# Altium PCB Robot  Omini Design.PcbDoc
Units mm, origin at the board's own origin, x right, y up, seen from the top; angles counter-clockwise.
Board outline 129.92 x 101.35 mm, 2 copper layers (Top Layer, Bottom Layer); 20 components, 38 nets, 167 pads, 10 vias.
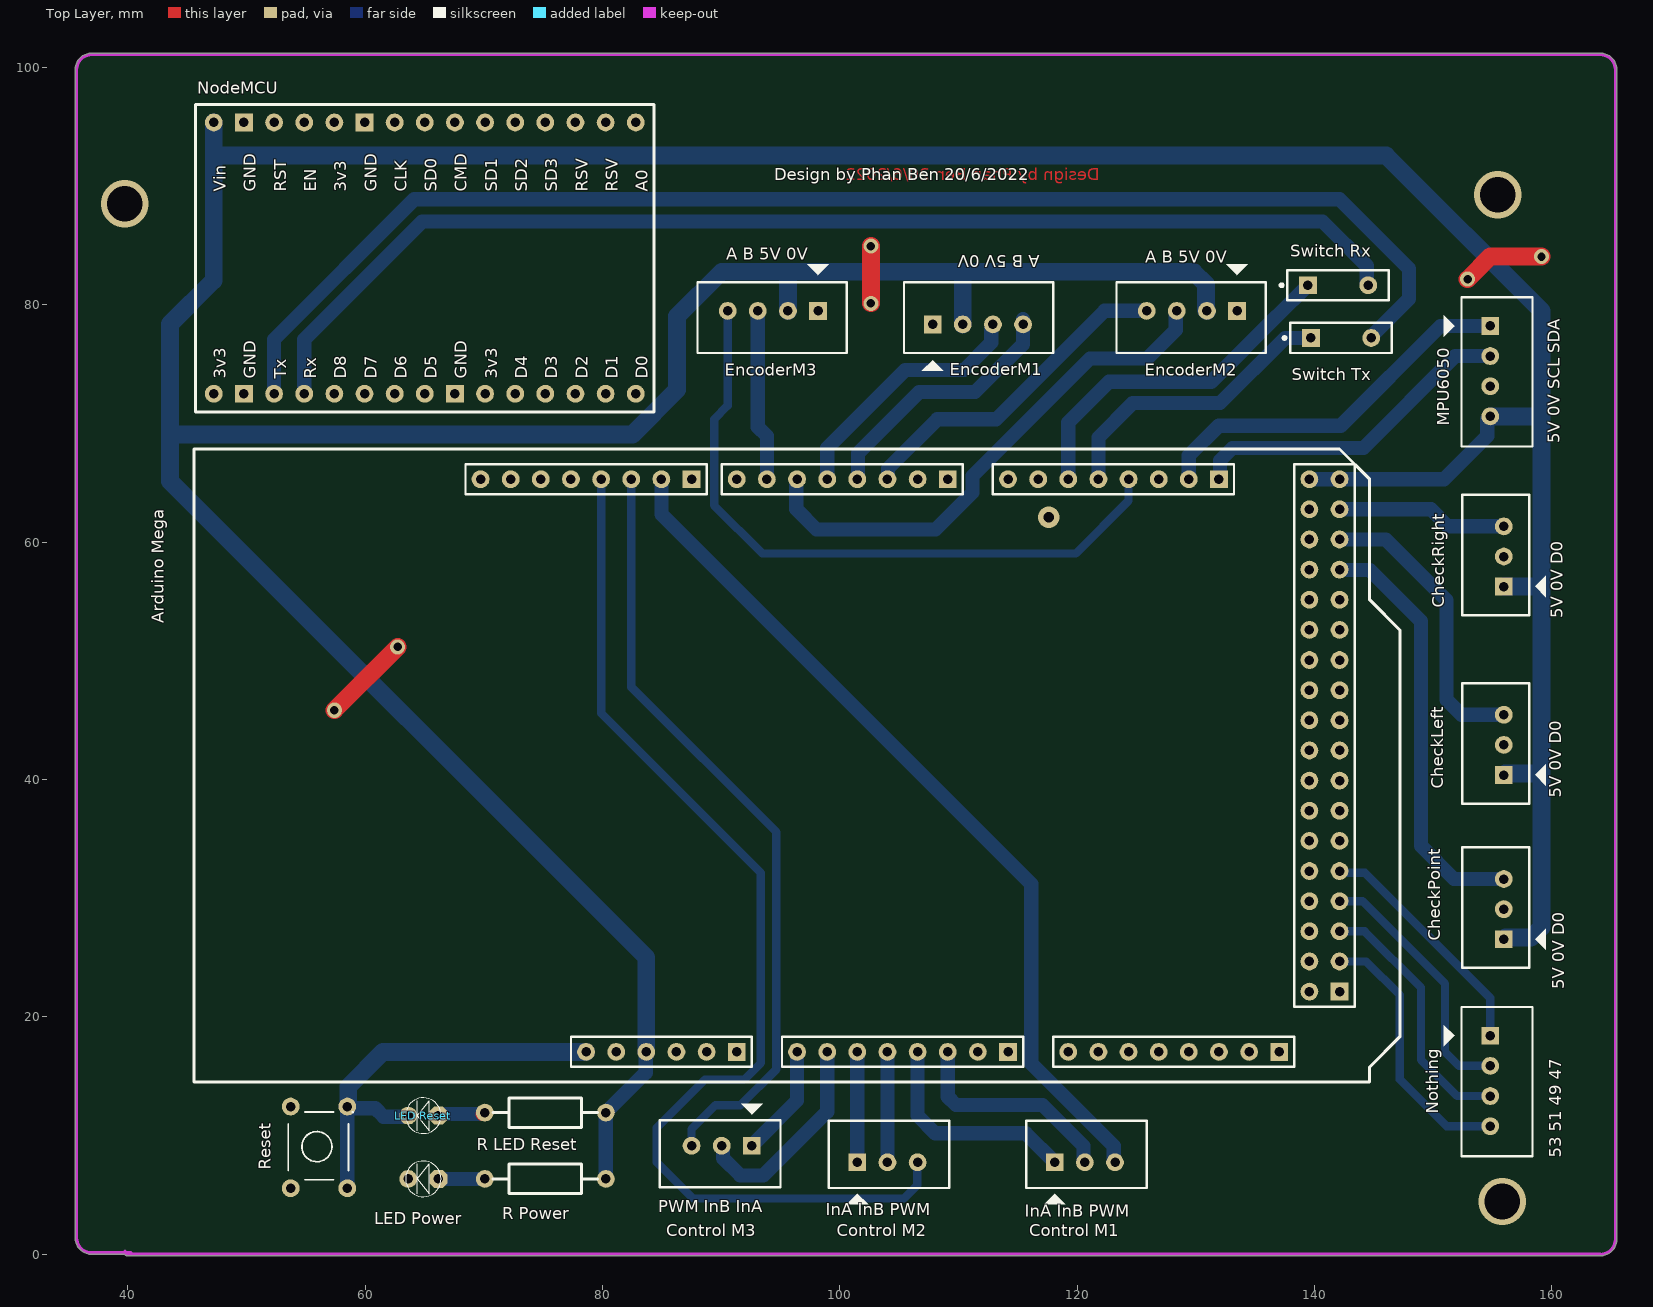
[diagram p0: Top Layer view]
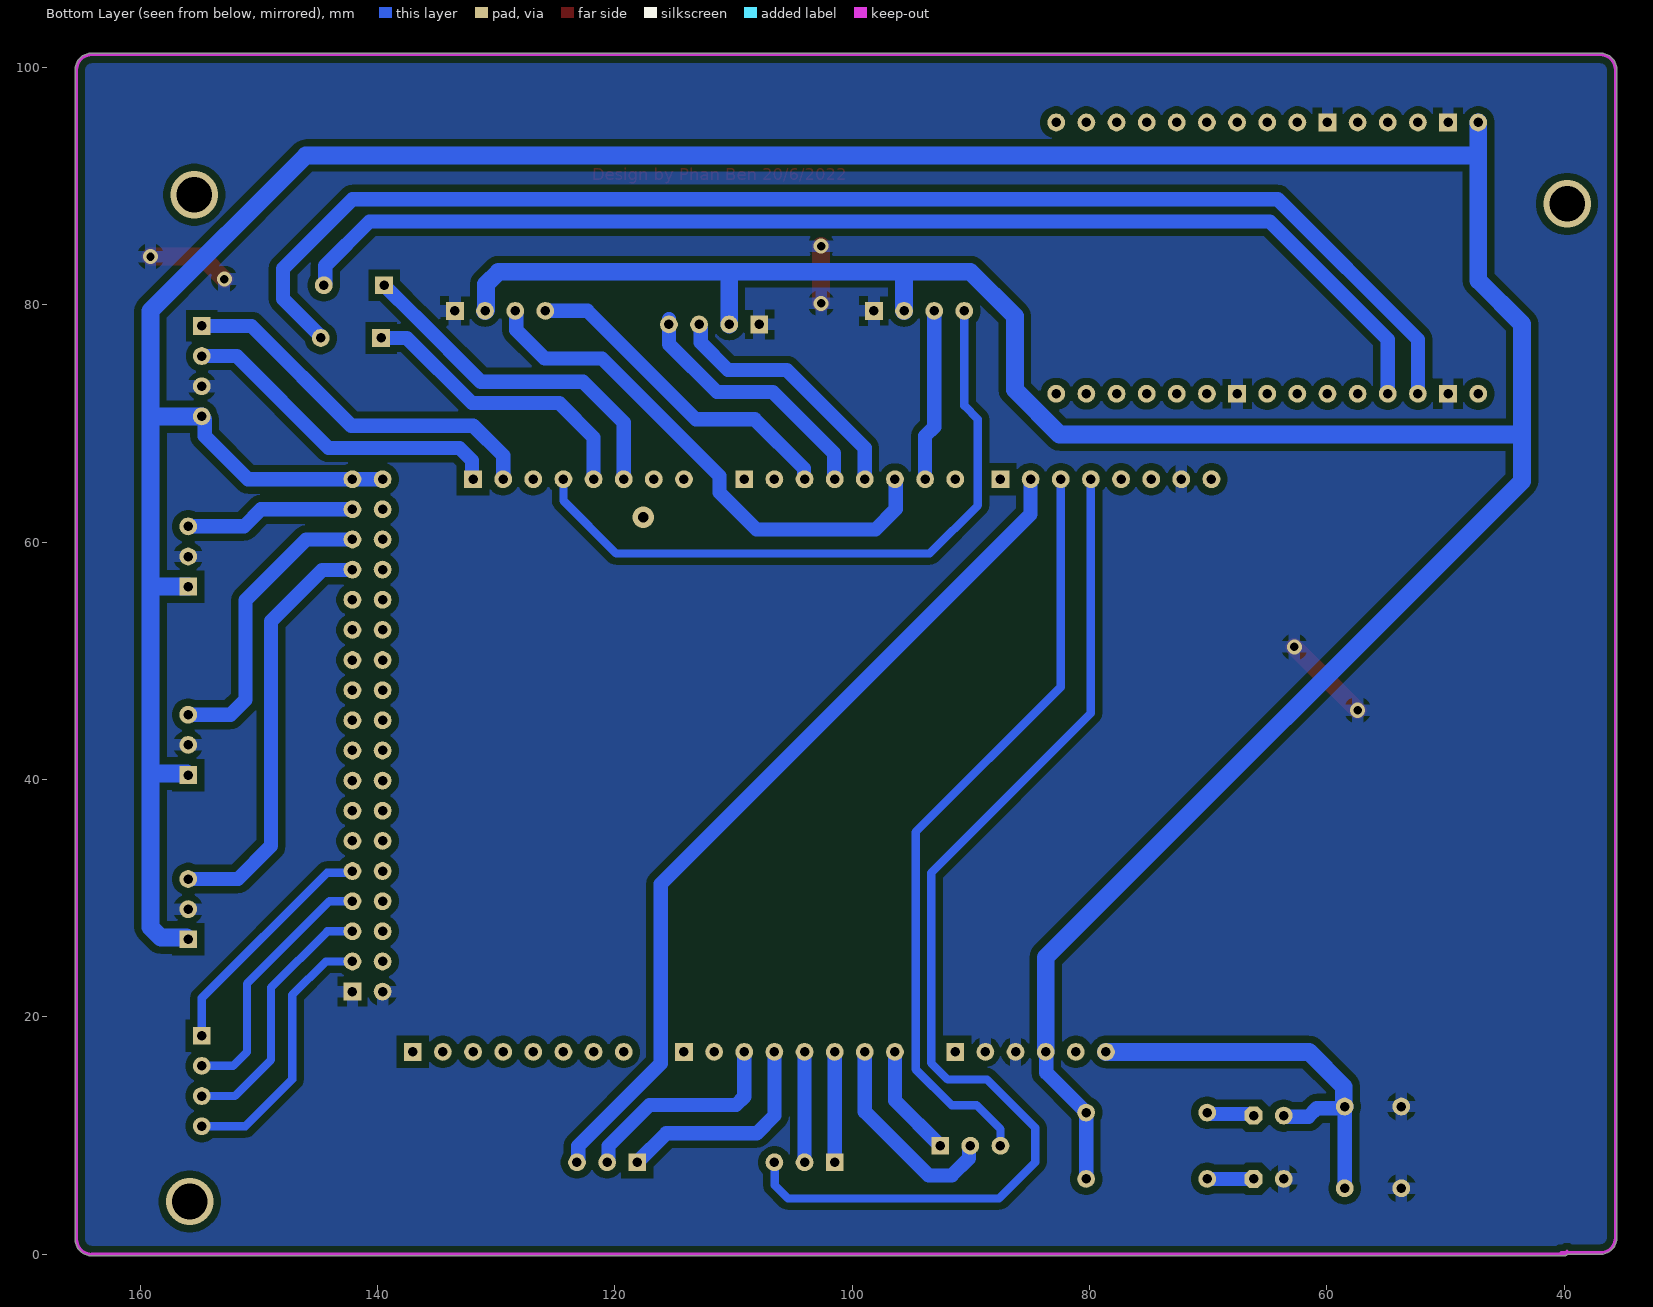
[diagram p1: Bottom Layer view, seen from below]
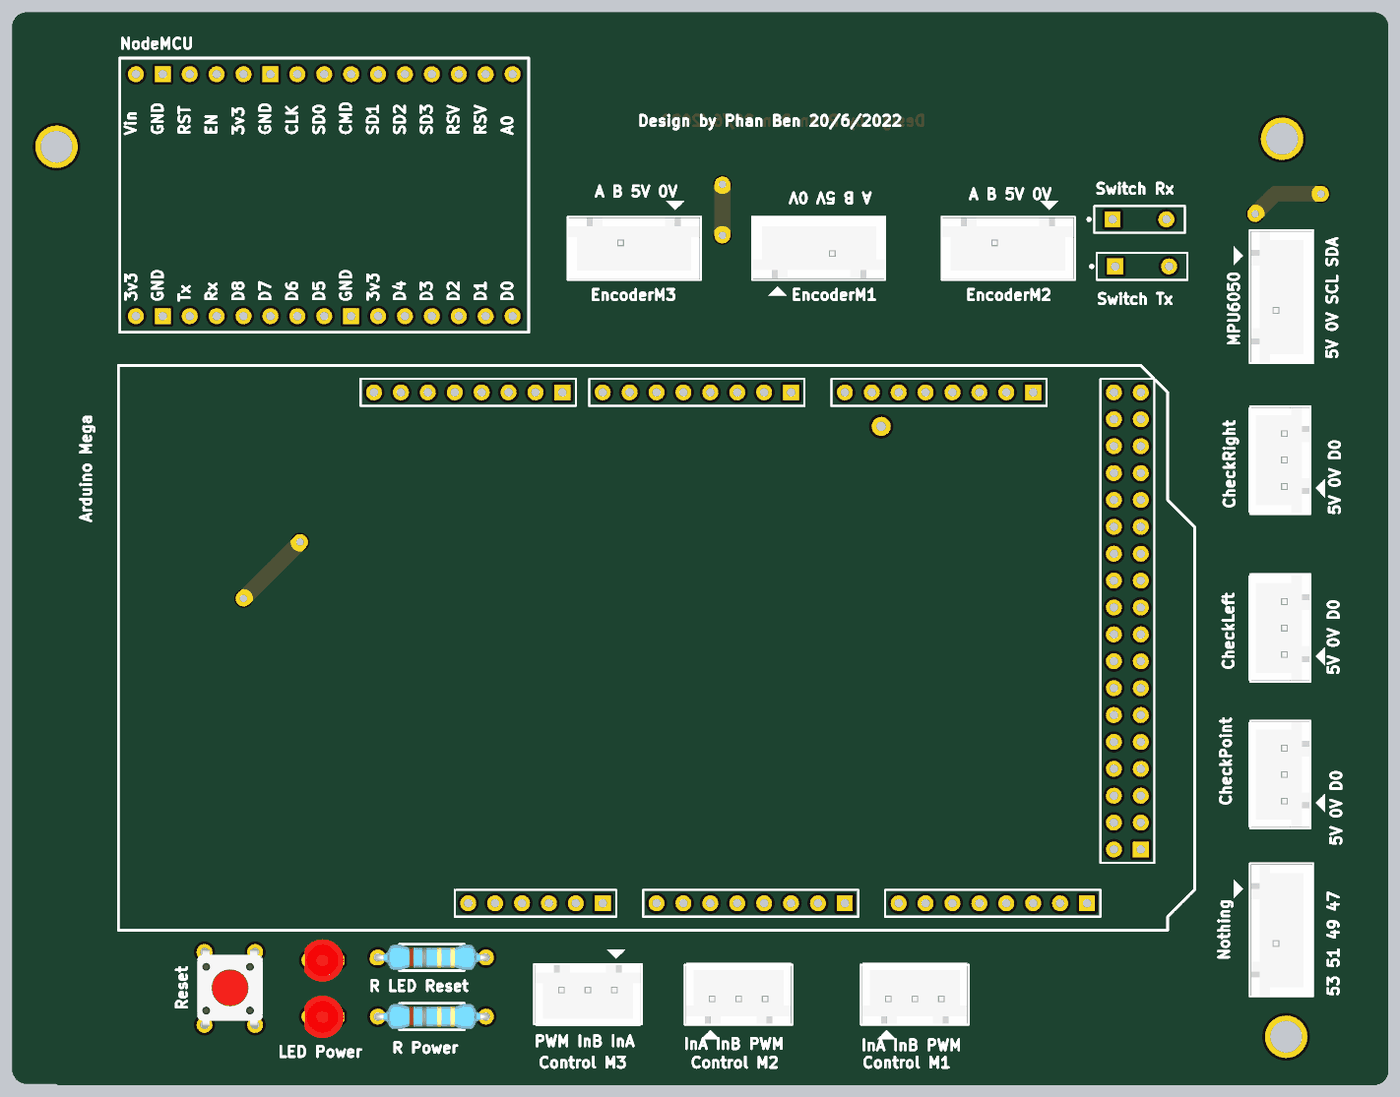
[diagram p2: 3D render of the assembled board from above, using the file's embedded part models]

## Layer stack, top to bottom
Top Solder: solder mask 0.0102, Solder Resist, Dk 3.5
Top Layer: signal copper 0.0356
Dielectric 1: dielectric 0.32, FR-4, Dk 4.8
Bottom Layer: signal copper 0.0356
Bottom Solder: solder mask 0.0102, Solder Resist, Dk 3.5

## Board outline
35.56,1.397 ccw(c36.957,1.397) 36.957,0 39.721,0 ccw(c40.005,0.254) 40.005,-0.127 164.084,-0.127 ccw(c164.084,1.27) 165.481,1.27 165.481,99.822 ccw(c164.084,99.822) 164.084,101.219 36.957,101.219 ccw(c36.957,99.822) 35.56,99.822

## Design rules (kind name [scope] priority, off if disabled: settings)
Clearance [All] p1: gap=0.6 ignorepadtopadclearanceinfootprint=FALSE
PlaneConnect [All] p1: planeconnectstyle=Relief reliefexpansion=1 reliefentries=4 reliefconductorwidth=1 reliefairgap=1
PolygonConnect [All] p1: connectstyle=Relief reliefconductorwidth=1 reliefentries=4 polygonreliefangle="90 Angle" airgapwidth=0.5
RoutingVias [All] p1: holewidth=0.711 width=1.27 viastyle="Through Hole" minholewidth=0.711 minwidth=1.27 maxholewidth=0.711 maxwidth=1.27
SolderMaskExpansion [All] p1: expansion=0.254 istentingtop=FALSE
Width [All] p1: maxlimit=1.5 minlimit=0.7 preferedwidth=1.2 minimp=50.000000 maximp=50.000000 favimp=50.000000 checkconnectedcopper=TRUE
29 further rules are at their usual default settings.

## Components (designator, comment, footprint, x,y, rotation, side; value= is the part's Value field where it differs from the comment)
"Arduino Mega" "ARDUINO MEGA" "ARDUINO MEGA" 98.933,42.456 r0 top
CheckLeft "" "Header DT 3P_2.54" 155.956,40.386 r180 top
CheckPoint "" "Header DT 3P_2.54" 155.956,26.543 r180 top
CheckRight "" "Header DT 3P_2.54" 155.956,56.261 r180 top
"Control M1" "" "Header DT 3P_2.54" 118.11,7.747 r90 top
"Control M2" "" "Header DT 3P_2.54" 101.473,7.747 r90 top
"Control M3" "" "Header DT 3P_2.54" 92.583,9.144 r270 top
EncoderM1 "Header 4P 2.54 Duc Thang" "Header DT 4P_2.54" 107.823,78.359 r90 top
EncoderM2 "Header 4P 2.54 Duc Thang" "Header DT 4P_2.54" 133.477,79.502 r270 top
EncoderM3 "Header 4P 2.54 Duc Thang" "Header DT 4P_2.54" 98.171,79.502 r270 top
"LED Power" "LED 3mm" LED-3MM-RED 66.167,6.35 r180 top
"LED Reset" "LED 3mm" LED-3MM-RED 66.167,11.684 r180 top
MPU6050 "Header 4P 2.54 Duc Thang" "Header DT 4P_2.54" 154.813,78.232 r0 top
NodeMCU "Node MCU ESP8266" "NodeMCU DevKit v1.0 - Inside Labels" 47.244,72.517 r90 top
Nothing "Header 4P 2.54 Duc Thang" "Header DT 4P_2.54" 154.813,18.415 r0 top
"R LED Reset" "330" "tro vach 1/4w" 75.184,11.938 r180 top
"R Power" "330" "tro vach 1/4w" 75.184,6.35 r180 top
Reset "Nut Nhan 4 Chan Cam 6x6" "Nut Nhan 4 Chan Cam 6x6" 53.518,5.893 r90 top
"Switch Rx" "SW-SPST" SPST-2 141.986,81.661 r0 top
"Switch Tx" "SW-SPST" SPST-2 142.24,77.216 r0 top

## Footprints (in the part's own frame and the unit in brackets; to place one, negate y for a bottom-side part, rotate by r counter-clockwise, add the part's x,y. Pads: shape width x height; smd on the part's side, far side on the other; paste and mask are expansions set on the pad)
"ARDUINO MEGA" [mm] "Arduino Mega 2560"
  rect 1.5x1.5 hole 0.8: 0(10.16,22.86) 8(-11.43,22.86) 21(33.02,22.86) 59(-7.62,-25.4) 67(15.24,-25.4) 75(38.1,-25.4) 79(43.18,-20.32)
  round 1.5 hole 0.8: 1(7.62,22.86) 2(5.08,22.86) 3(2.54,22.86) 4(0,22.86) 5(-2.54,22.86) 6(-5.08,22.86) 7(-7.62,22.86) 9(-13.97,22.86) 10(-16.51,22.86) 11(-19.05,22.86) 12(-21.59,22.86) 13(-24.13,22.86) 14(15.24,22.86) 15(17.78,22.86) 16(20.32,22.86) 17(22.86,22.86) 18(25.4,22.86) 19(27.94,22.86) 20(30.48,22.86) 22(40.64,20.32) 23(43.18,20.32) 24(40.64,17.78) 25(43.18,17.78) 26(40.64,15.24) 27(43.18,15.24) 28(40.64,12.7) 29(43.18,12.7) 30(40.64,10.16) 31(43.18,10.16) 32(40.64,7.62) 33(43.18,7.62) 34(40.64,5.08) 35(43.18,5.08) 36(40.64,2.54) 37(43.18,2.54) 38(40.64,0) 39(43.18,0) 40(40.64,-2.54) 41(43.18,-2.54) 42(40.64,-5.08) 43(43.18,-5.08) 44(40.64,-7.62) 45(43.18,-7.62) 46(40.64,-10.16) 47(43.18,-10.16) 48(40.64,-12.7) 49(43.18,-12.7) 50(40.64,-15.24) 51(43.18,-15.24) 52(40.64,-17.78) 53(43.18,-17.78) 54(-20.32,-25.4) 55(-17.78,-25.4) 56(-15.24,-25.4) 57(-12.7,-25.4) 58(-10.16,-25.4) 60(-2.54,-25.4) 61(0,-25.4) 62(2.54,-25.4) 63(5.08,-25.4) 64(7.62,-25.4) 65(10.16,-25.4) 66(12.7,-25.4) 68(20.32,-25.4) 69(22.86,-25.4) 70(25.4,-25.4) 71(27.94,-25.4) 72(30.48,-25.4) 73(33.02,-25.4) 74(35.56,-25.4) 76(-26.67,22.86) 77(-29.21,22.86) 78(40.64,-20.32) 80(43.18,22.86) 81(40.64,22.86)
  silkscreen extent -53.34,-27.94 48.26,25.4
"Header DT 3P_2.54" [mm]
  rect 1.5x1.5 hole 0.8 unplated: 1(0,0)
  round 1.5 hole 0.8 unplated: 2(0,-2.54) 3(0,-5.08)
  silkscreen extent -3.54,-7.75 3.51,2.41, body extent -2.07,-7.62 3.68,2.28, height 7
"Header DT 4P_2.54" [mm]
  rect 1.5x1.5 hole 0.8: 1(0,0)
  round 1.5 hole 0.8: 2(0,-2.54) 3(0,-5.08) 4(0,-7.62)
  silkscreen extent -3.92,-10.16 3.56,2.41, body extent -2.29,-10.11 3.46,2.29, height 7
LED-3MM-RED [mm]
  oct 1.5x1.5 hole 0.8: 1(0,0)
  round 1.5 hole 0.8: 2(2.54,0)
  silkscreen extent -0.23,-1.5 2.77,1.5, body extent -0.69,-1.97 2.98,2.03, height 4.6
"NodeMCU DevKit v1.0 - Inside Labels" [mm]
  round 1.5 hole 0.8: 1(0,0) 3(0,-5.08) 4(0,-7.62) 5(0,-10.16) 6(0,-12.7) 7(0,-15.24) 8(0,-17.78) 10(0,-22.86) 11(0,-25.4) 12(0,-27.94) 13(0,-30.48) 14(0,-33.02) 15(0,-35.56) 16(22.86,-35.56) 17(22.86,-33.02) 18(22.86,-30.48) 19(22.86,-27.94) 20(22.86,-25.4) 21(22.86,-22.86) 22(22.86,-20.32) 23(22.86,-17.78) 24(22.86,-15.24) 26(22.86,-10.16) 27(22.86,-7.62) 28(22.86,-5.08) 30(22.86,0)
  rect 1.5x1.5 hole 0.8: 2(0,-2.54) 9(0,-20.32) 25(22.86,-12.7) 29(22.86,-2.54)
  silkscreen extent -1.52,-37.08 24.38,1.52
"Nut Nhan 4 Chan Cam 6x6" [mm] "SW button 4pin, 250 x250 mil"
  round 1.5 hole 0.8: 1(-0.33,-0.203) 1(6.553,-0.203) 2(-0.33,-4.978) 2(6.553,-4.978)
  silkscreen extent 0.38,-5.46 6.1,0, body extent -0.77,-5.71 7.12,0.48, height 7
SPST-2 [mm] "Switch; 2 Leads"
  rect 1.5x1.5 hole 0.8: 1(-2.54,0)
  round 1.5 hole 0.8: 2(2.54,0)
  silkscreen extent -4.89,-1.27 4.28,1.27
"tro vach 1/4w" [mm]
  round 1.5 hole 0.8: 1(-5.1,0) 2(5.1,0)
  silkscreen extent -4.39,-1.25 4.42,1.25, body extent -5.38,-1.2 5.38,1.2, height 2.41

## Part data
CheckLeft CheckPoint CheckRight "Control M1" "Control M2" "Control M3": library part "Header 3P 2.54 Duc Thang", "Cắm", Chung_Loai=Cắm, Don_Vi=Con, Ma_Hang=MH001292, Ten_Linh_Kien="Header 3P XH2.54-3P Đực Thẳng"
EncoderM1 EncoderM2 EncoderM3 MPU6050 Nothing: "Cắm", Chung_Loai=Cắm, Don_Vi=Con, Ma_Hang=MH001285, Ten_Linh_Kien="Header 4P XH2.54-4P Đực Thẳng"
"LED Power" "LED Reset": library part "LED 3mm Do", "Cắm", Chung_Loai=Cắm, Don_Vi=Con, Ma_Hang=MH003892, Ten_Linh_Kien="Led 3MM Phủ Đỏ (10c)"
NodeMCU: library part "NodeMCU DevKit v1.0"
"R LED Reset" "R Power": library part "Tro Vach 1/4W 5% 510R", "Cắm", Chung_Loai=Cắm, Don_Vi=Con, Ma_Hang=MH007325, So_Chan=2, Ten_Linh_Kien="Trở Vạch 1/4w 5% 510R"
Reset: "Nut Nhan 4 Chan 6x6mm", Ma_Hang=MH004584, Ten="Nút Nhấn 4 Chân 6x6x5MM DIP"
"Switch Rx" "Switch Tx": "Single-Pole, Single-Throw Switch", LatestRevisionDate=17-Jul-2002, LatestRevisionNote="Re-released for DXP Platform.", PackageDescription="Switch; 2 Leads", PackageReference=SPST-2, Published=24-Mar-1999, Publisher="Altium Limited"

## Free pads (board coordinates)
  round 1.5 hole 0.8: 6(155.956,56.261)

## Via types
v1: diameter 1.27, hole 0.711, Top Layer to Bottom Layer, 6 vias
v2: diameter 4, hole 3, Top Layer to Bottom Layer, 3 vias
v3: diameter 1.8, hole 0.9, Top Layer to Bottom Layer, 1 vias

## Nets (pads, with @x,y where several pads share a name; then routed paths per layer and width w, separated by ;. In a path a pad name is that pad's centre, name@x,y a point inside that pad or via, vN(x,y) a via of type N, cw(c..) or ccw(c..) an arc to the next point about the centre after c; other vN are vias at no path point)
2: "Arduino Mega.2" EncoderM2.4 | length 28.2
  Bottom Layer w1.2: 104.013,65.316 104.07,65.374 104.07,66.224 108.204,70.358 113.157,70.358 122.301,79.502 EncoderM2.4
3: "Arduino Mega.3" EncoderM1.4 | length 22
  Bottom Layer w1.2: 101.473,65.316 101.53,65.374 101.53,67.494 106.702,72.666 111.401,72.666 115.427,76.692 EncoderM1.4@115.427,78.814
4: "Arduino Mega.4" EncoderM1.3 | length 21.3
  Bottom Layer w1.2: 98.933,65.316 98.933,67.945 105.507,74.519 110.46,74.519 112.768,76.827 EncoderM1.3@112.768,78.029
5: "Arduino Mega.5" EncoderM2.3 | length 44.6
  Bottom Layer w1.2: 96.393,65.316 96.336,65.259 96.336,62.795 98.044,61.087 108.061,61.087 111.177,64.203 111.177,65.584 113.157,67.564 121.075,75.482 125.901,75.482 128.317,77.898 128.317,79.422 EncoderM2.3
5v: "Arduino Mega.56" "Arduino Mega.80" "Arduino Mega.81" "R LED Reset.1" "R Power.1" CheckLeft.1 CheckPoint.1 CheckRight.1 EncoderM1.2 EncoderM2.2 EncoderM3.2 MPU6050.4 NodeMCU.30 pad.6 | length 417.5
  Bottom Layer w1.2: 80.284,6.35 80.284,11.938 ; 80.391,12.045 83.636,15.29 83.636,16.999 83.693,17.056 ; 139.573,65.316 142.113,65.316 150.914,65.316 154.559,68.961 154.559,70.358 MPU6050.4
  Bottom Layer w1.5: NodeMCU.30 47.244,92.583 ; 83.693,17.056 83.693,25.019 43.561,65.151 43.561,69.088 ; EncoderM3.2 95.631,82.804 ; EncoderM1.2 110.363,82.677 110.236,82.804 ; EncoderM2.2 130.86,79.579 130.86,81.738 129.794,82.804 110.236,82.804 ; MPU6050.4 159.004,70.612 159.131,70.485 ; CheckPoint.1 156.095,26.682 158.252,26.682 159.131,27.561 159.131,40.513 ; CheckLeft.1 156.083,40.513 159.131,40.513 ; CheckRight.1 159.004,56.261 159.131,56.388 ; 43.561,69.088 82.523,69.088 86.283,72.848 86.283,79.044 90.043,82.804 95.631,82.804 ; 43.561,69.088 43.561,78.388 47.244,82.071 47.244,92.583 ; 47.244,92.583 146.05,92.583 159.131,79.502 159.131,70.485 ; 95.631,82.804 110.236,82.804 ; 159.131,40.513 159.131,56.388 ; 159.131,56.388 159.131,70.485
6: "Arduino Mega.6" EncoderM3.3 | length 14.5
  Bottom Layer w1.2: EncoderM3.3 93.091,69.723 93.853,68.961 93.853,65.316
9: "Arduino Mega.9" "Control M1.3" | length 73.4
  Bottom Layer w1.2: 84.963,65.316 84.963,62.357 116.123,31.197 116.123,16.084 123.079,9.128 123.079,7.858 123.19,7.747
10: "Arduino Mega.10" "Control M3.3" | length 65.4
  Bottom Layer w0.7: 82.423,65.316 82.423,47.79 94.645,35.568 94.645,15.591 91.613,12.559 89.521,12.559 87.503,10.541 87.503,9.144
11: "Arduino Mega.11" "Control M2.3" | length 94.3
  Bottom Layer w0.7: 79.883,65.316 79.883,45.593 93.345,32.131 93.345,16.129 91.948,14.732 88.646,14.732 84.582,10.668 84.582,7.747 87.63,4.699 105.41,4.699 106.519,5.808 106.519,7.713 106.553,7.747
18: "Arduino Mega.18" EncoderM3.4 | length 57.1
  Bottom Layer w0.7: EncoderM3.4 90.551,71.508 89.408,70.365 89.408,63.119 93.472,59.055 119.888,59.055 124.333,63.5 124.333,65.316
22: "Arduino Mega.22"
23: "Arduino Mega.23" CheckRight.3 | length 14.4
  Bottom Layer w1.2: 142.113,62.776 149.822,62.776 151.257,61.341 CheckRight.3
24: "Arduino Mega.24"
25: "Arduino Mega.25" CheckLeft.3 | length 24.9
  Bottom Layer w1.2: 142.113,60.236 146.012,60.236 151.13,55.118 151.13,46.736 152.4,45.466 CheckLeft.3
26: "Arduino Mega.26"
27: "Arduino Mega.27" CheckPoint.3 | length 35.7
  Bottom Layer w1.2: 142.113,57.696 142.151,57.658 144.653,57.658 148.971,53.34 148.971,34.417 151.765,31.623 CheckPoint.3
47: "Arduino Mega.47" Nothing.1 | length 20.3
  Bottom Layer w0.7: 142.113,32.296 142.266,32.143 144.26,32.143 154.813,21.59 Nothing.1
49: "Arduino Mega.49" Nothing.2 | length 21.8
  Bottom Layer w0.7: 142.113,29.756 144.046,29.756 151.003,22.8 151.003,17.047 152.175,15.875 Nothing.2
51: "Arduino Mega.51" Nothing.3 | length 22
  Bottom Layer w0.7: 142.113,27.216 144.234,27.216 148.971,22.479 148.971,16.383 152.019,13.335 Nothing.3
53: "Arduino Mega.53" Nothing.4 | length 22.6
  Bottom Layer w0.7: 142.113,24.676 144.361,24.676 147.193,21.844 147.193,14.732 151.13,10.795 Nothing.4
A0: "Arduino Mega.60" "Control M3.1" | length 9.5
  Bottom Layer w1.2: 92.583,9.144 96.393,12.954 96.393,17.056
A1: "Arduino Mega.61" "Control M3.2" | length 17.7
  Bottom Layer w1.2: 90.043,9.144 90.154,9.033 90.154,8.098 91.618,6.634 93.548,6.634 98.933,12.019 98.933,17.056
A2: "Arduino Mega.62" "Control M2.1" | length 9.3
  Bottom Layer w1.2: 101.473,7.747 101.473,17.056
A3: "Arduino Mega.63" "Control M2.2" | length 9.3
  Bottom Layer w1.2: 104.013,7.747 104.013,17.056
A4: "Arduino Mega.64" "Control M1.1" | length 18.6
  Bottom Layer w1.2: 106.553,17.056 106.553,11.684 108.05,10.187 115.67,10.187 118.11,7.747
A5: "Arduino Mega.65" "Control M1.2" | length 18.4
  Bottom Layer w1.2: 109.093,17.056 109.093,13.276 109.796,12.573 117.088,12.573 120.539,9.122 120.539,7.858 120.65,7.747
GND: "Arduino Mega.57" "Arduino Mega.58" "Arduino Mega.76" "Arduino Mega.78" "Arduino Mega.79" "LED Power.2" CheckLeft.2 CheckPoint.2 CheckRight.2 EncoderM1.1 EncoderM2.1 EncoderM3.1 MPU6050.3 NodeMCU.2 NodeMCU.9 NodeMCU.25 NodeMCU.29 Reset.1 | length 19.4
  Top Layer w1.5: v1(57.404,45.847) v1(62.738,51.181) ; v1(102.616,80.137) v1(102.616,84.963) ; v1(152.908,82.169) 154.813,84.074 v1(159.131,84.074)
"NetLED Power_1": "LED Power.1" "R Power.2" | length 3.9
  Bottom Layer w1.2: 66.167,6.35 70.084,6.35
"NetLED Reset_1": "LED Reset.1" "R LED Reset.2" | length 4
  Top Layer w1.2: 66.167,11.684 66.294,11.811 ; 69.903,11.811 70.03,11.938 70.084,11.938
  Bottom Layer w1.2: 66.294,11.811 69.903,11.811
Reset: "Arduino Mega.54" "LED Reset.2" Reset.2 | length 35.4
  Bottom Layer w1.2: Reset.2@58.496,5.563 58.496,12.446 58.631,12.311 60.841,12.311 61.554,11.598 63.541,11.598 63.627,11.684
  Bottom Layer w1.5: Reset.2@58.496,12.446 58.574,12.523 58.574,14.124 61.506,17.056 78.613,17.056
rx0: "Switch Rx.2" NodeMCU.4 | length 101.5
  Bottom Layer w1.2: NodeMCU.4 54.864,77.089 64.815,87.04 140.671,87.04 144.402,83.309 144.402,81.785 144.526,81.661
rx01: "Arduino Mega.16" "Switch Rx.1" | length 29.8
  Bottom Layer w1.2: 119.253,65.316 119.253,70.104 122.682,73.533 131.301,73.533 136.784,79.016 136.801,79.016 139.446,81.661
rx1: NodeMCU.13
SCL: "Arduino Mega.21" MPU6050.2 | length 28
  Bottom Layer w1.2: 131.953,65.316 132.033,65.396 132.033,66.882 133.096,67.945 144.123,67.945 151.87,75.692 MPU6050.2
SDA: "Arduino Mega.20" MPU6050.1 | length 31.9
  Bottom Layer w1.2: 129.413,65.316 129.413,67.31 131.931,69.828 142.218,69.828 150.622,78.232 MPU6050.1
tx0: "Switch Tx.2" NodeMCU.3 | length 114.7
  Bottom Layer w1.2: NodeMCU.3 52.324,77.095 64.129,88.9 142.113,88.9 147.955,83.058 147.955,80.518 144.78,77.343 144.78,77.216
tx01: "Arduino Mega.17" "Switch Tx.1" | length 24.9
  Bottom Layer w1.2: 121.793,65.316 121.793,68.834 124.692,71.733 132.046,71.733 137.529,77.216 139.7,77.216
tx1: NodeMCU.14
pads on no net: "Arduino Mega.0" "Arduino Mega.1" "Arduino Mega.7" "Arduino Mega.8" "Arduino Mega.12" "Arduino Mega.13" "Arduino Mega.14" "Arduino Mega.15" "Arduino Mega.19" "Arduino Mega.28" "Arduino Mega.29" "Arduino Mega.30" "Arduino Mega.31" "Arduino Mega.32" "Arduino Mega.33" "Arduino Mega.34" "Arduino Mega.35" "Arduino Mega.36" "Arduino Mega.37" "Arduino Mega.38" "Arduino Mega.39" "Arduino Mega.40" "Arduino Mega.41" "Arduino Mega.42" "Arduino Mega.43" "Arduino Mega.44" "Arduino Mega.45" "Arduino Mega.46" "Arduino Mega.48" "Arduino Mega.50" "Arduino Mega.52" "Arduino Mega.55" "Arduino Mega.59" "Arduino Mega.66" "Arduino Mega.67" "Arduino Mega.68" "Arduino Mega.69" "Arduino Mega.70" "Arduino Mega.71" "Arduino Mega.72" "Arduino Mega.73" "Arduino Mega.74" "Arduino Mega.75" "Arduino Mega.77" NodeMCU.1 NodeMCU.5 NodeMCU.6 NodeMCU.7 NodeMCU.8 NodeMCU.10 NodeMCU.11 NodeMCU.12 NodeMCU.15 NodeMCU.16 NodeMCU.17 NodeMCU.18 NodeMCU.19 NodeMCU.20 NodeMCU.21 NodeMCU.22 NodeMCU.23 NodeMCU.24 NodeMCU.26 NodeMCU.27 NodeMCU.28
copper on no net:
  other v2: 155.829,4.445 39.751,88.519 155.448,89.281
  other v3: 117.602,62.103

## Polygon pours and split planes (outlines as drawn)
GND on Bottom Layer "NONET_L-01_P-001" (solid, remove dead copper, pour order 0): 35.877,100.965 165.799,100.965 165.799,0 35.877,0 35.752,1.018

## Keep-outs
Keep-Out Layer:
  lines w0.254: 39.751,0.254 ccw(c40.005,0.254) 40.005,0 157.861,0 164.084,0 ccw(c164.084,1.27) 165.354,1.27 165.354,5.969 165.354,99.822 ccw(c164.084,99.822) 164.084,101.092 76.581,101.092 36.957,101.092 ccw(c36.957,99.822) 35.687,99.822 35.687,97.409 35.687,1.397 ccw(c36.957,1.397) 36.957,0.127 40.259,0.127

## Other copper
Top Layer:
  text "Design by Phan Ben 20/6/2022" at 121.92,90.503 h1

## Silkscreen, mask and mechanical layers (free items; w line width, h text height)
Top Overlay:
  text "Design by Phan Ben 20/6/2022" at 94.488,90.503 h1
  text "A B 5V 0V" at 116.84,84.201 h1 r180
  text "A B 5V 0V" at 90.424,83.82 h1
  text "A B 5V 0V" at 125.73,83.566 h1
  text "5V 0V SCL SDA" at 160.655,68.326 h1 r90
  text "5V 0V D0" at 160.909,53.594 h1 r90
  text "5V 0V D0" at 160.782,38.481 h1 r90
  text "5V 0V D0" at 161.036,22.352 h1 r90
  text "53 51 49 47" at 160.782,8.128 h1 r90
  text "PWM InB InA" at 84.709,3.556 h1
  text "InA InB PWM" at 98.806,3.302 h1
  text "InA InB PWM" at 115.57,3.175 h1

## Text inside footprints (layer, text, board x,y; h text height)
NodeMCU: Top Overlay "D1" at 81.28,73.787 h1 r90; Top Overlay "GND" at 50.8,89.535 h1 r90; Top Overlay "SD1" at 71.12,89.535 h1 r90; Top Overlay "D2" at 78.74,73.787 h1 r90; Top Overlay "D5" at 66.04,73.787 h1 r90; Top Overlay "SD2" at 73.66,89.535 h1 r90; Top Overlay "RST" at 53.34,89.535 h1 r90; Top Overlay "SD3" at 76.2,89.535 h1 r90; Top Overlay "EN" at 55.88,89.535 h1 r90; Top Overlay "GND" at 60.96,89.535 h1 r90; Top Overlay "D6" at 63.5,73.787 h1 r90; Top Overlay "CLK" at 63.5,89.535 h1 r90; Top Overlay "A0" at 83.82,89.535 h1 r90; Top Overlay "Vin" at 48.26,89.535 h1 r90; Top Overlay "GND" at 68.58,73.787 h1 r90; Top Overlay "D8" at 58.42,73.787 h1 r90; Top Overlay "RSV" at 81.28,89.535 h1 r90; Top Overlay "3v3" at 58.42,89.535 h1 r90; Top Overlay "3v3" at 48.26,73.787 h1 r90; Top Overlay "D0" at 83.82,73.787 h1 r90; Top Overlay "D4" at 73.66,73.787 h1 r90; Top Overlay "GND" at 50.8,73.787 h1 r90; Top Overlay "CMD" at 68.58,89.535 h1 r90; Top Overlay "D3" at 76.2,73.787 h1 r90; Top Overlay "SD0" at 66.04,89.535 h1 r90; Top Overlay "3v3" at 71.12,73.787 h1 r90; Top Overlay "Tx" at 53.34,73.787 h1 r90; Top Overlay "Rx" at 55.88,73.787 h1 r90; Top Overlay "D7" at 60.96,73.787 h1 r90; Top Overlay "RSV" at 78.74,89.535 h1 r90